# Altium PCB Audio_Amp.PcbDoc
Units mm, origin at the board's own origin, x right, y up, seen from the top; angles counter-clockwise.
Board outline 55.88 x 70.23 mm, 2 copper layers (Top Layer, Bottom Layer); 31 components, 21 nets, 82 pads, 85 vias.
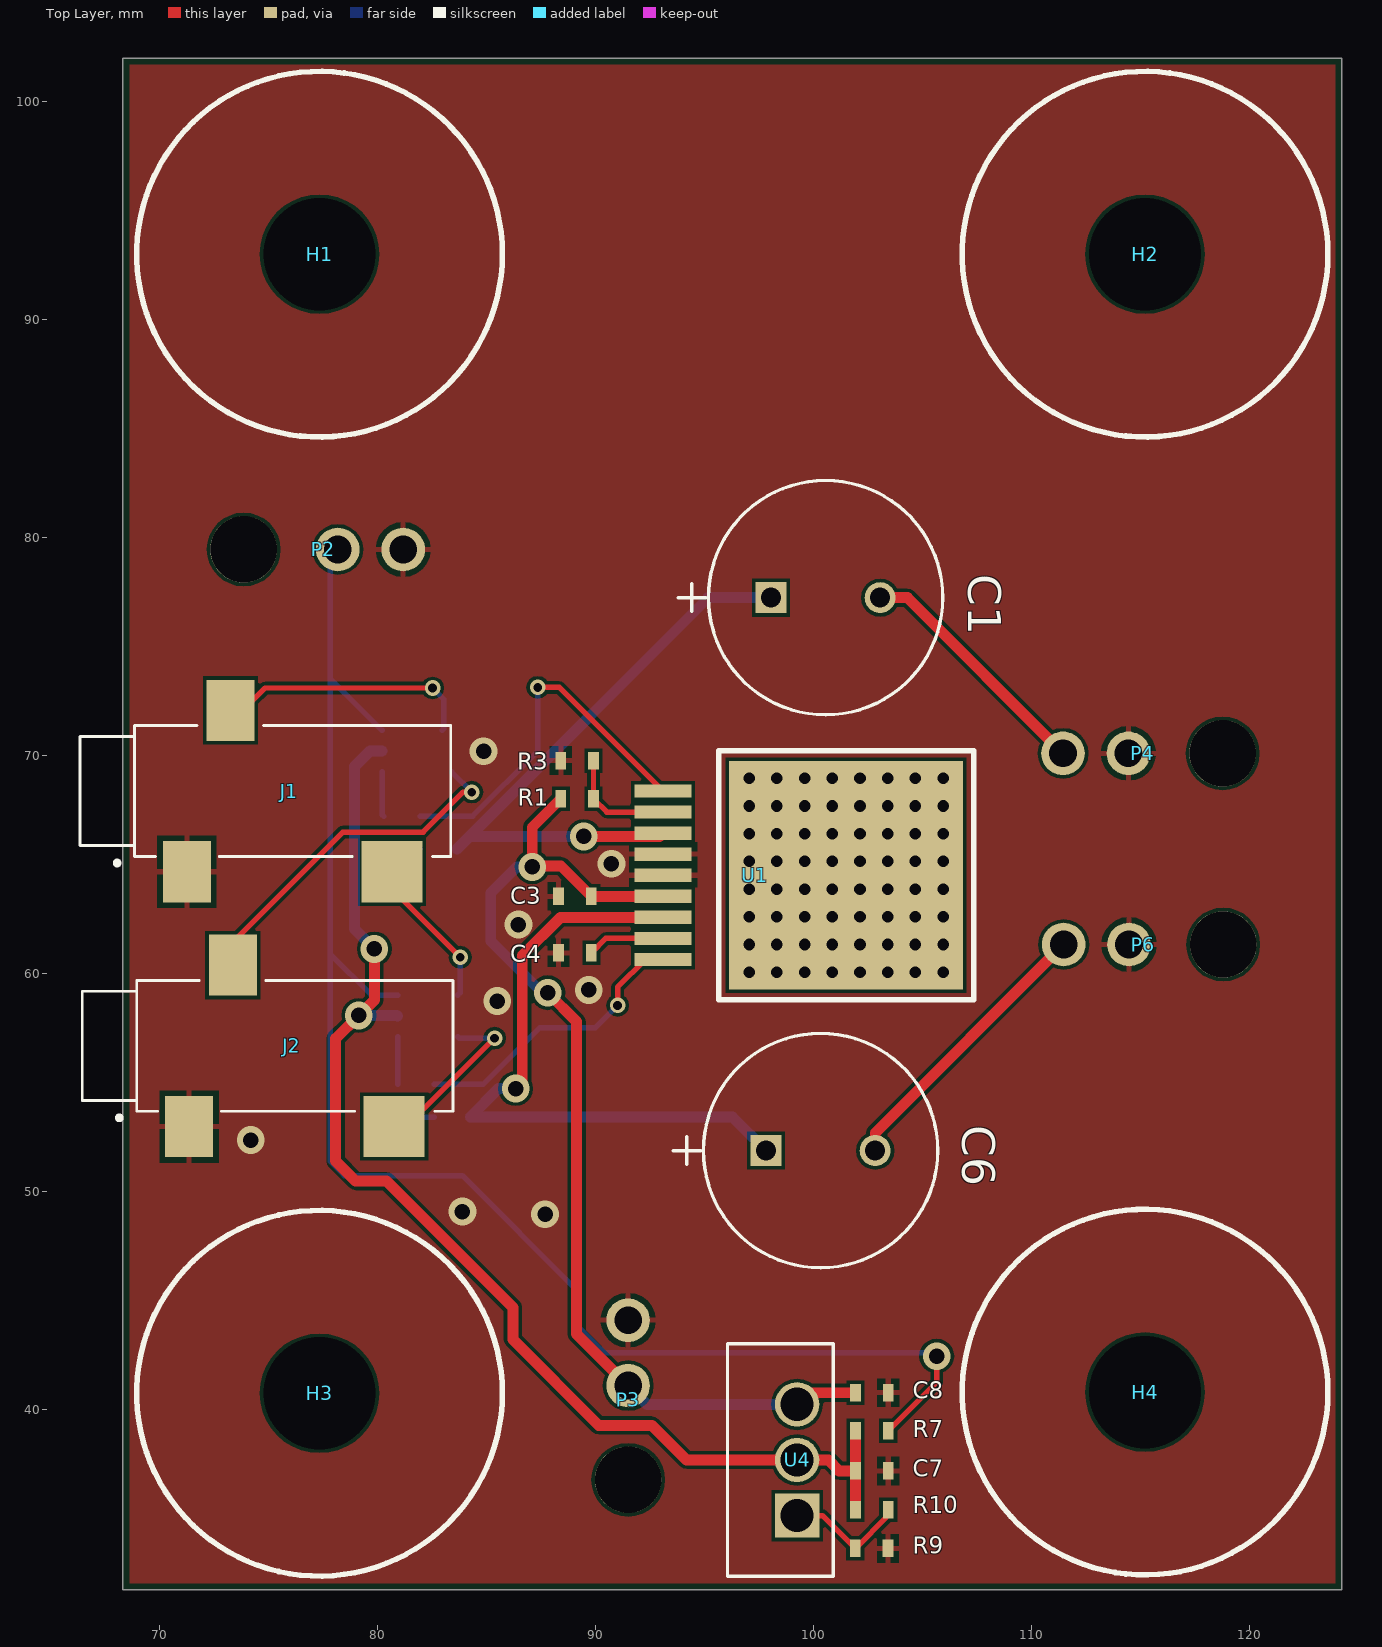
[diagram p0: Top Layer view]
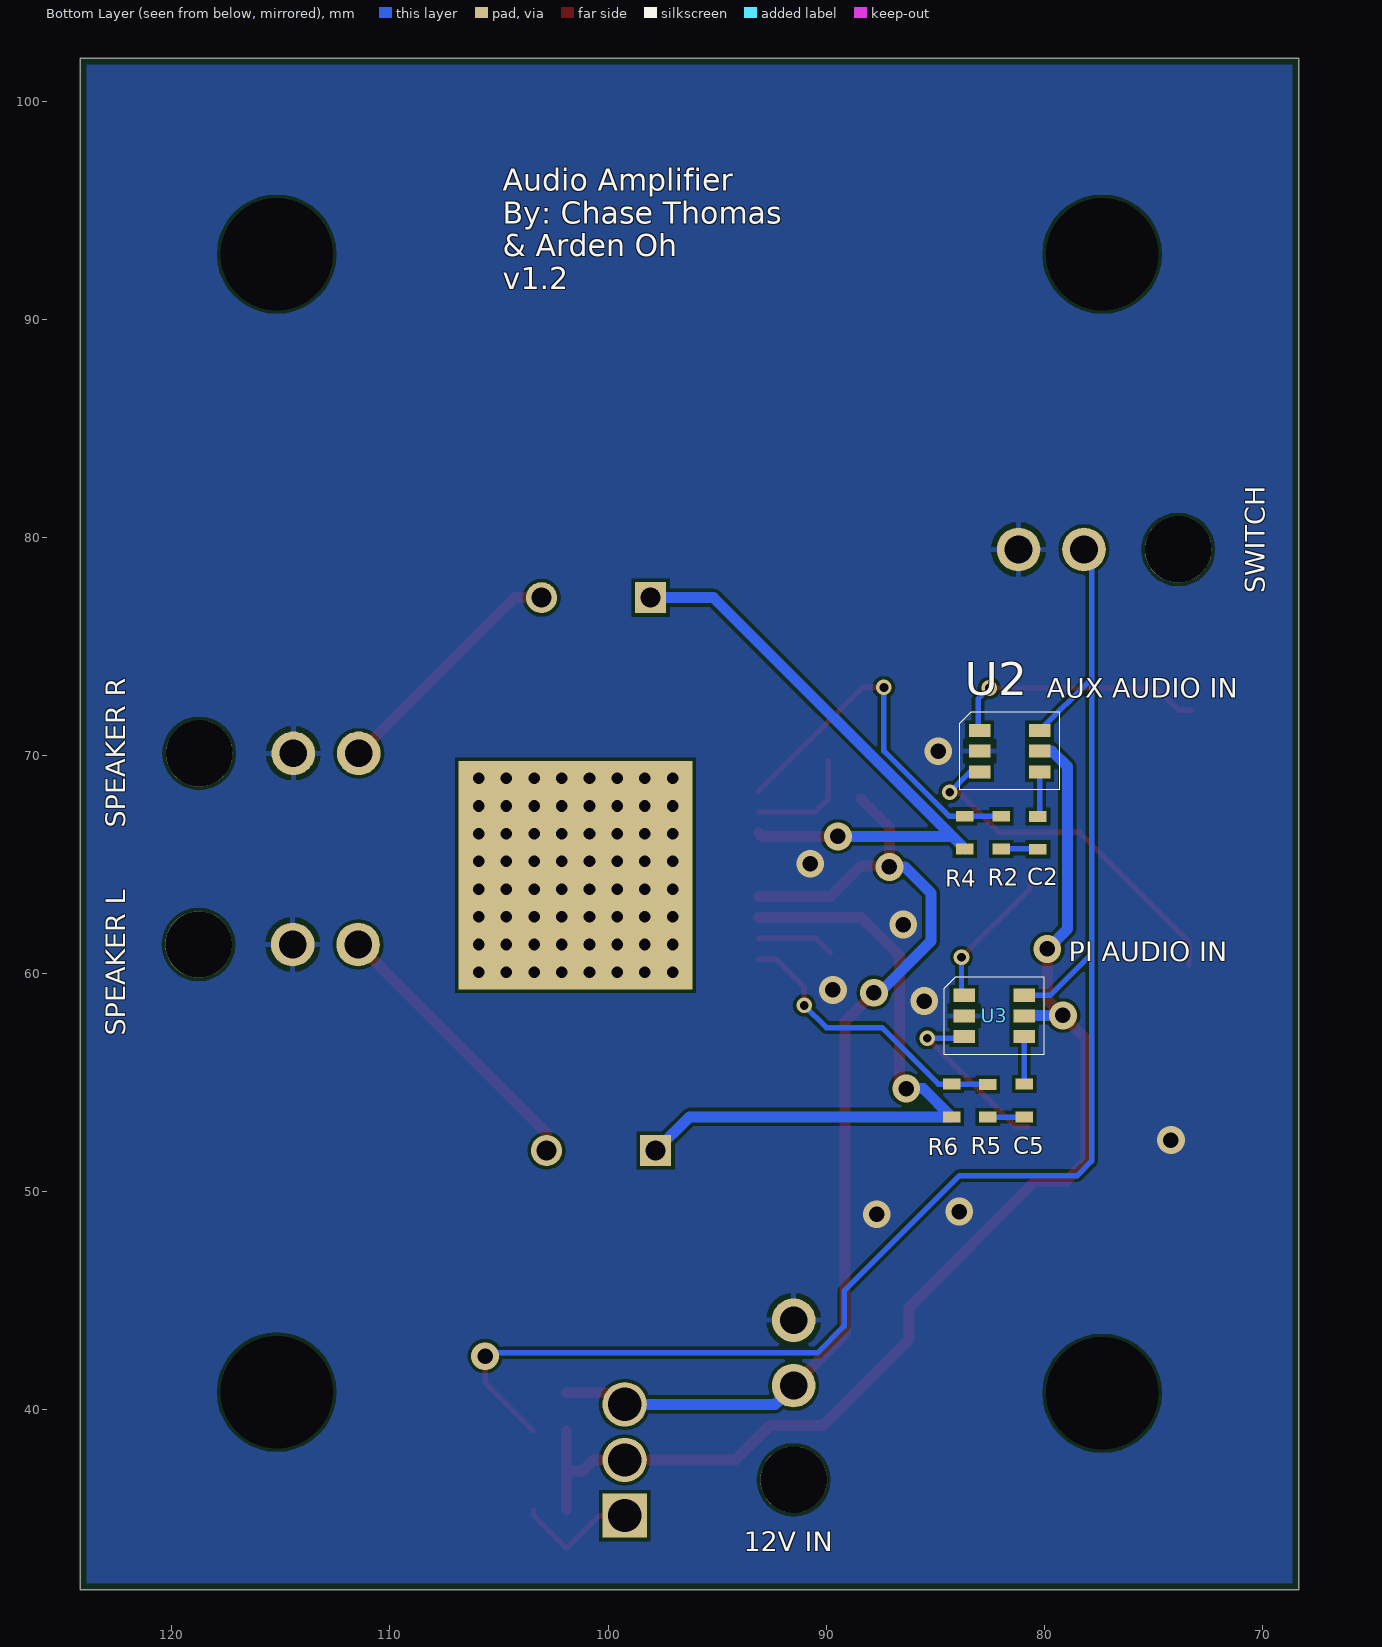
[diagram p1: Bottom Layer view, seen from below]

## Layer stack, top to bottom
Top Solder: solder mask 0.0102, Solder Resist, Dk 3.5
Top Layer: signal copper 0.0356
Dielectric 1: dielectric 0.32, FR-4, Dk 4.8
Bottom Layer: signal copper 0.0356
Bottom Solder: solder mask 0.0102, Solder Resist, Dk 3.5

## Board outline
68.326,31.75 124.206,31.75 124.206,101.981 68.326,101.981

## Design rules (kind name [scope] priority, off if disabled: settings)
BoardOutlineClearance [All] p1: gap=0.3 ignorepadtopadclearanceinfootprint=FALSE
Clearance [All] p1: gap=0.152 ignorepadtopadclearanceinfootprint=FALSE except(0: Arc-Hole Track-Hole SMDPad-Hole THPad-Hole Via-Hole Fill-Hole Poly-Hole Region-Hole Text-Hole)
ComponentClearance [All] p1: gap=0.1 collisioncheckmode=3 verticalgap=0.254 showdistances=FALSE
FabricationTestPointUsage TestPointUsage [All] p1: valid=0 allowmultiple=FALSE
FabricationTestpoint Testpoint [All] p1: side=3 testpointundercomponent=TRUE minsize=1.016 maxsize=2.54 preferedsize=1.524 minholesize=0 maxholesize=1.016 preferedholesize=0.813 testpointgrid=0.025 allowsidetop=TRUE allowsidebottom=TRUE usegrid=TRUE gridtolerance=0
HoleSize [All] p1: absolutevalues=TRUE maxlimit=6.3 minlimit=0.3 maxpercent=80.000 minpercent=20.000
HoleToHoleClearance [All] p1: gap=0.45 allowstackedmicrovias=TRUE
MinimumAnnularRing [All] p1: minimumring=0.15
MinimumSolderMaskSliver [All] p1: minsoldermaskwidth=0.075
PlaneClearance [All] p1: clearance=0.5
PlaneConnect [All] p1: planeconnectstyle=Direct reliefexpansion=0.508 reliefentries=4 reliefconductorwidth=0.254 reliefairgap=0.254
PolygonConnect "GND Via" [isVia AND InNet('GND')] p1: connectstyle=Direct reliefconductorwidth=0.254 reliefentries=4 polygonreliefangle="90 Angle" airgapwidth=0.254 // GND Via Connection
PolygonConnect [All] p2: connectstyle=Relief reliefconductorwidth=0.254 reliefentries=4 polygonreliefangle="90 Angle" airgapwidth=0.25
RoutingVias [All] p1: holewidth=0.3 width=0.6 viastyle="Through Hole" minholewidth=0.3 minwidth=0.6 maxholewidth=6.3 maxwidth=6.6
SilkToSilkClearance [All] p1: silktosilkclearance=0.15
SilkToSolderMaskClearance SilkscreenOverComponentPads [IsPad] p1: minsilkscreentomaskgap=0.25 clearancetoexposedcopper=TRUE
SolderMaskExpansion [All] p1: expansion=0.1
Width [All] p1: maxlimit=2 minlimit=0.152 preferedwidth=0.25 minimp=50.000000 maximp=50.000000 favimp=50.000000
20 further rules are at their usual default settings.

## Components (designator, comment, footprint, x,y, rotation, side; value= is the part's Value field where it differs from the comment)
C1 "470uF" CAP_PAN_10X12.5 103.048,77.241 r0 top value=Value
C2 "C060-000U39-00" PCB_GENERIC_SMD_0603 80.289,66.458 r270 bottom value=0.39uF
C3 "C060-000U39-00" PCB_GENERIC_SMD_0603 89.052,63.551 r0 top value=1uF
C4 "C060-000U39-00" PCB_GENERIC_SMD_0603 89.052,60.96 r0 top value=10uF
C5 "C060-000U39-00" PCB_GENERIC_SMD_0603 80.924,54.192 r270 bottom value=0.39uF
C6 "470uF" CAP_PAN_10X12.5 102.819,51.892 r0 top value=Value
C7 "C060-000U39-00" PCB_GENERIC_SMD_0603 102.667,37.211 r180 top value=1uF
C8 "C060-000U39-00" PCB_GENERIC_SMD_0603 102.667,40.792 r180 top value=0.1uF
H1 "Hole M4" #10Hole 59.817,79.4 r0 top
H2 "Hole M4" #10Hole 97.663,79.4 r0 top
H3 "Hole M4" #10Hole 59.817,27.178 r0 top
H4 "Hole M4" #10Hole 97.663,27.229 r0 top
J1 "SJ-3523-SMT-TR" CUI_SJ-3523-SMT-TR 72.365,68.377 r0 top
J2 "SJ-3523-SMT-TR" CUI_SJ-3523-SMT-TR 72.466,56.693 r0 top
P2 "SCH_MLX_1X2" PCB_MLX_MICROFIT_1X2 75.67,79.451 r270 top
P3 "SCH_MLX_1X2" PCB_MLX_MICROFIT_1X2 91.491,38.608 r0 top
P4 "SCH_MLX_1X2" PCB_MLX_MICROFIT_1X2 116.938,70.104 r90 top
P6 "SCH_MLX_1X2" PCB_MLX_MICROFIT_1X2 116.967,61.341 r90 top
R1 "R060-00203-01" PCB_GENERIC_SMD_0603 89.154,68.021 r180 top value=100K
R2 "R060-00203-01" PCB_GENERIC_SMD_0603 81.966,66.472 r90 bottom value=20K
R3 "R060-00203-01" PCB_GENERIC_SMD_0603 89.154,69.774 r0 top value=100K
R4 "R060-00203-01" PCB_GENERIC_SMD_0603 83.642,66.472 r270 bottom value=50K
R5 "R060-00203-01" PCB_GENERIC_SMD_0603 82.601,54.178 r90 bottom value=20K
R6 "R060-00203-01" PCB_GENERIC_SMD_0603 84.252,54.19 r90 bottom value=50K
R7 "R060-00203-01" PCB_GENERIC_SMD_0603 102.667,39.04 r180 top value=1K
R9 "R060-00203-01" PCB_GENERIC_SMD_0603 102.655,33.655 r0 top value=150
R10 "R060-00203-01" PCB_GENERIC_SMD_0603 102.667,35.433 r0 top value=100
U1 "LM4950TSX/NOPB" TS9A 101.486,64.516 r270 top
U2 "SN74LVC1G3157DBVR" SOT95P280X145-6N 81.585,70.206 r180 bottom
U3 "SN74LVC1G3157DBVR" SOT95P280X145-6N 82.296,58.064 r180 bottom
U4 "LM317T" TO-220 97.714,40.259 r90 top value=Value

## Footprints (in the part's own frame and the unit in brackets; to place one, negate y for a bottom-side part, rotate by r counter-clockwise, add the part's x,y. Pads: shape width x height; smd on the part's side, far side on the other; paste and mask are expansions set on the pad)
#10Hole [mil]
  round 0 hole 202.76 unplated mask+78.74: 1(690,535)
  silkscreen extent 360,205 1020,865
CAP_PAN_10X12.5 [mil]
  rect 56x56 / inner round 60 / far side rect 56x56 hole 36 paste+0 mask+0: 1(-197,0)
  round 56 / inner round 60 / far side round 56 hole 36 paste+0 mask+0: 2(0,0)
  silkscreen extent -365,-212 113,212, body extent -294,-194 100,200, height 490
CUI_SJ-3523-SMT-TR [mm] "CONN JACK STEREO 3.5MM"
  rect 2.2x2.8 smd: 1(-1.1,-3.7) 3(0.9,3.7)
  rect 2.8x2.8 smd: 2(8.3,-3.7)
  silkscreen extent -6,-3.4 11,3, body extent -5.95,-4.5 11.05,4.5, height 5
PCB_GENERIC_SMD_0603 [mm]
  rect 0.5x0.8 smd: 1(-0.75,0) 2(0.75,0)
  body extent -0.75,-0.5 0.75,0.5, height 0.45
PCB_MLX_MICROFIT_1X2 [mm]
  round 2 hole 1.27: 1(0,2.511) 2(0,5.508)
  round 3.048 hole 3.048 unplated: ""(0,-1.807)
  body extent -3.58,-6.52 3.58,5.72, height 8.77
SOT95P280X145-6N [mm] "SOT23, 6-Leads, Body 2.90x2.80mm, Pitch 0.95mm, IPC Medium Density"
  rect 1x0.6 smd: 1(-1.375,0.95) 2(-1.375,0) 3(-1.375,-0.95) 4(1.375,-0.95) 5(1.375,0) 6(1.375,0.95)
  silkscreen extent -2.29,-1.78 2.29,1.78, body extent -1.5,-1.53 1.5,1.53, height 1.45
TO-220 [mil] "IC REG LIN POS ADJ 1.5A TO220AB"
  rect 80x80 / inner round 60 / far side rect 80x80 hole 60: 1(-200.79,-60)
  round 80 / inner round 60 / far side round 80 hole 60: 2(-100.39,-60) 3(0,-60)
  silkscreen extent -310,-126 110,66, body extent 0,0 10,10, height 10
TS9A [mil]
  rect 24x103 smd paste+0 mask+0: 1(-152,-330.5) 2(-114,-330.5) 3(-76,-330.5) 4(-38,-330.5) 5(0,-330.5) 6(38,-330.5) 7(76,-330.5) 8(114,-330.5) 9(152,-330.5)
  rect 412x422 smd paste+0 mask+0: 10(0,0)
  rect 412x422 smd far side paste+0 mask+0: 10(0,0)
  silkscreen extent -225,-230 225,230, body extent -205,-309 205,162, height 188

## Part data
C1 C6: library part EEU-FR1E471B, "Imported", Built_By=EMA_UL_Team, C="Copyright (C) 2015 Accelerated Designs. All rights reserved", MANUFACTURER_PART_NUMBER=EEU-FR1E471B, RefDes=RefDes, Type=DEV, VENDOR=Panasonic
C2 C3 C4 C5 C7 C8: "CAP CER 0603 0.39uF 16V X5R 20%", Package=0603, Tolerance=20%, Voltage=16V
H1 H2 H3 H4: library part #10Hole
J1 J2: "CONN JACK STEREO 3.5MM"
R1 R2 R3 R4 R5 R6 R7 R9 R10: "RES 0603 20K 5% 100mW", Package=0603, Power=100mW, Tolerance=1%
U1: "IC AMP AUDIO PWR 7.5W AB TO263-9", Manufacturer=TI, Digikey Part #=LM4950TSX/NOPBCT-ND, Manufacturer Part #=LM4950TSX/NOPB
U2 U3: "1 Circuit IC Switch 2:1 15 Ohm SOT-23-6", Manufacturer=TI, Digikey Part #=296-14908-1-ND, Manufacturer Part #=SN74LVC1G3157DBVR
U4: "IC REG LIN POS ADJ 1.5A TO220AB", Built_By=EMA_UL_Team, C="Copyright (C) 2015 Accelerated Designs. All rights reserved", MANUFACTURER_PART_NUMBER=LM317T, RefDes=RefDes, Type=Type, VENDOR=STMicroelectronics

## Via types
v1: diameter 0.953, hole 0.533, Top Layer to Bottom Layer, 64 vias
v2: diameter 1.27, hole 0.711, Top Layer to Bottom Layer, 15 vias
v3: diameter 0.714, hole 0.4, Top Layer to Bottom Layer, 6 vias

## Nets (pads, with @x,y where several pads share a name; then routed paths per layer and width w, separated by ;. In a path a pad name is that pad's centre, name@x,y a point inside that pad or via, vN(x,y) a via of type N, cw(c..) or ccw(c..) an arc to the next point about the centre after c; other vN are vias at no path point)
3V3: C7.2 R7.2 R10.1 U2.5 U3.5 U4.2 | length 56.7
  Top Layer w0.5: v2(79.858,61.138) 79.858,58.801 v2(79.146,58.09) 78.08,57.023 78.08,51.41 78.994,50.495 80.416,50.495 86.208,44.704 86.208,43.231 90.145,39.294 92.583,39.294 94.168,37.709 U4.2 100.67,37.709 101.168,37.211 C7.2 ; R10.1 C7.2 ; R7.2 C7.2
  Bottom Layer w0.5: v2(79.146,58.09) 80.896,58.09 U3.5 ; v2(79.858,61.138) 78.943,62.052 78.943,69.494 79.654,70.206 U2.5
12V: C3.2 C8.2 P3.1 R1.2 U1.6 U4.3 | length 49
  Top Layer w0.5: v2(87.808,59.131) 89.129,57.81 89.129,43.481 P3.1 ; R1.2 87.097,66.714 v2(87.097,64.897) 87.149,64.949 88.404,64.949 C3.2 U1.6 ; U4.3 99.771,40.792 C8.2
  Bottom Layer w0.5: v2(87.097,64.897) 86.385,64.897 85.192,63.703 85.192,61.493 87.554,59.131 v2(87.808,59.131) ; P3.1 92.351,40.259 U4.3
GND: C3.1 C4.1 C7.1 C8.1 J1.1 J2.1 P2.2 P3.2 P4.1 P6.1 R3.1 R9.2 U1.4 U1.5 U2.2 U3.2
  other v2: 87.681,48.971 83.896,49.098 74.193,52.375 85.496,58.75 89.687,59.258 86.462,62.255 90.729,65.049 84.861,70.206
NetC1_1: C1.1 R4.2 U1.3 | length 28.1
  Top Layer w0.5: v2(89.459,66.294) 92.939,66.294 U1.3
  Bottom Layer w0.5: R4.2 84.214,66.294 ; v2(89.459,66.294) 84.214,66.294 ; C1.1 95.162,77.241 84.214,66.294
NetC1_2: C1.2 P4.2 | length 11.3
  Top Layer w0.5: C1.2 104.292,77.241 P4.2
NetC2_1: C2.1 U2.4 | length 2.1
  Bottom Layer w0.25: U2.4 80.21,67.288 C2.1
NetC2_2: C2.2 R2.1 | length 1.7
  Bottom Layer w0.25: C2.2 80.303,65.722 R2.1
NetC4_2: C4.2 U1.8 | length 3.6
  Top Layer w0.25: C4.2 90.463,61.62 U1.8
NetC5_1: C5.1 U3.4 | length 2.2
  Bottom Layer w0.25: U3.4 80.921,54.945 C5.1
NetC5_2: C5.2 R5.1 | length 1.7
  Bottom Layer w0.25: C5.2 80.938,53.428 R5.1
NetC6_1: C6.1 R6.1 U1.7 | length 30.2
  Top Layer w0.5: v2(86.335,54.737) 86.639,55.042 86.639,60.833 88.392,62.586 U1.7
  Bottom Layer w0.5: v2(86.335,54.737) 85.549,54.737 R6.1 96.267,53.44 C6.1
NetC6_2: C6.2 P6.2 | length 13
  Top Layer w0.5: C6.2 102.819,52.701 P6.2
NetJ1_2: J1.2 U3.1 | length 7
  Top Layer w0.25: J1.2 80.665,63.887 v3(83.795,60.757)
  Bottom Layer w0.25: U3.1 83.795,59.138 v3(83.795,60.757)
NetJ1_3: J1.3 U2.1 | length 11.9
  Top Layer w0.25: J1.3 73.821,72.077 74.845,73.101 v3(82.525,73.101)
  Bottom Layer w0.25: v3(82.525,73.101) 83.036,72.59 83.036,71.232 U2.1
NetJ2_2: J2.2 U3.3 | length 8
  Top Layer w0.25: J2.2 81.314,52.993 v3(85.369,57.048)
  Bottom Layer w0.25: U3.3 83.737,57.048 v3(85.369,57.048)
NetJ2_3: J2.3 U2.3 | length 16.2
  Top Layer w0.25: J2.3 73.366,61.454 78.41,66.497 82.093,66.497 83.922,68.326 v3(84.328,68.326)
  Bottom Layer w0.25: U2.3@83.398,69.256 v3(84.328,68.326)
NetP2_1: P2.1 R7.1 U2.6 U3.6 | length 72.2
  Top Layer w0.25: R7.1 105.639,41.262 v2(105.639,42.469)
  Bottom Layer w0.25: 77.842,73.524 U2.6 ; P2.1 77.826,79.096 77.826,60.909 ; U3.6 79.72,59.014 77.826,60.909 ; v2(105.639,42.469) 105.486,42.621 90.399,42.621 89.179,43.84 89.179,45.466 83.896,50.749 78.486,50.749 77.826,51.41 77.826,60.909
NetR1_1: R1.1 R3.2 U1.2 | length 5.2
  Top Layer w0.25: R3.2 R1.1 90.514,67.412 U1.2
NetR2_2: R2.2 R4.1 U1.1 | length 17.2
  Top Layer w0.25: v3(87.351,73.127) 88.341,73.127 U1.1
  Bottom Layer w0.25: R2.2 R4.1 84.367,67.222 87.351,70.206 v3(87.351,73.127)
NetR5_2: R5.2 R6.2 U1.9 | length 13.4
  Top Layer w0.25: v3(91.008,58.547) 91.008,59.385 92.278,60.655 U1.9
  Bottom Layer w0.25: R5.2 82.613,54.94 R6.2 84.856,54.94 87.447,57.531 89.992,57.531 v3(91.008,58.547)
NetR9_1: R9.1 R10.2 U4.1 | length 5.7
  Top Layer w0.25: U4.1 100.401,35.159 R9.1 103.417,35.167 R10.2
pads on no net: H1.1 H2.1 H3.1 H4.1 P2. P3. P4. P6. U1.10
copper on no net:
  other v1: 97.041,60.071 98.311,60.071 99.581,60.071 100.851,60.071 102.121,60.071 103.391,60.071 104.661,60.071 105.931,60.071 97.041,61.341 98.311,61.341 99.581,61.341 100.851,61.341 102.121,61.341 103.391,61.341 104.661,61.341 105.931,61.341 97.041,62.611 98.311,62.611 99.581,62.611 100.851,62.611 102.121,62.611 103.391,62.611 104.661,62.611 105.931,62.611 97.041,63.881 98.311,63.881 99.581,63.881 100.851,63.881 102.121,63.881 103.391,63.881 104.661,63.881 105.931,63.881 97.041,65.151 98.311,65.151 99.581,65.151 100.851,65.151 102.121,65.151 103.391,65.151 104.661,65.151 105.931,65.151 97.041,66.421 98.311,66.421 99.581,66.421 100.851,66.421 102.121,66.421 103.391,66.421 104.661,66.421 105.931,66.421 97.041,67.691 98.311,67.691 99.581,67.691 100.851,67.691 102.121,67.691 103.391,67.691 104.661,67.691 105.931,67.691 97.041,68.961 98.311,68.961 99.581,68.961 100.851,68.961 102.121,68.961 103.391,68.961 104.661,68.961 105.931,68.961

## Polygon pours and split planes (outlines as drawn)
GND on Top Layer "Top Layer-GND" (solid, pour order 0): 68.25,102.26 68.301,102.311 124.79,102.311 124.79,30.709 124.739,30.658 68.25,30.658
GND on Bottom Layer "Top Layer-GND" (solid, pour order 2): 68.224,102.311 124.714,102.311 124.765,102.362 124.765,30.683 68.224,30.683

## Silkscreen, mask and mechanical layers (free items; w line width, h text height)
Bottom Overlay:
  text "Audio Amplifier / By: Chase Thomas / & Arden Oh / v1.2" at 104.826,91.389 h1
  text "SWITCH" at 69.901,77.445 h0.9 r270
  text "AUX AUDIO IN" at 79.883,72.644 h0.9
  text "SPEAKER R" at 122.123,66.7 h0.9 r270
  text "PI AUDIO IN" at 78.867,60.579 h0.9
  text "SPEAKER L" at 122.123,57.15 h0.9 r270
  text "12V IN" at 93.777,33.528 h0.9
Mechanical 2:
  the board outline again, w0.254

## Text inside footprints (layer, text, board x,y; h text height)
U1: Mechanical 13 "*" at 96.101,68.694 h1.27 r270